# Altium PCB NUC977 DEV BOARD.PcbDoc (part 5 of 5)
Units mil, origin at the board's own origin, x right, y up, seen from the top; angles counter-clockwise.
Board outline 9012.5 x 7677.17 mil, 4 copper layers (Top, 2-GND, 3-POWER, Bottom), stack 35.4 mil thick; 487 components, 451 nets, 1969 pads, 1529 vias.
Unrouted connection lines stored in the file: 1.
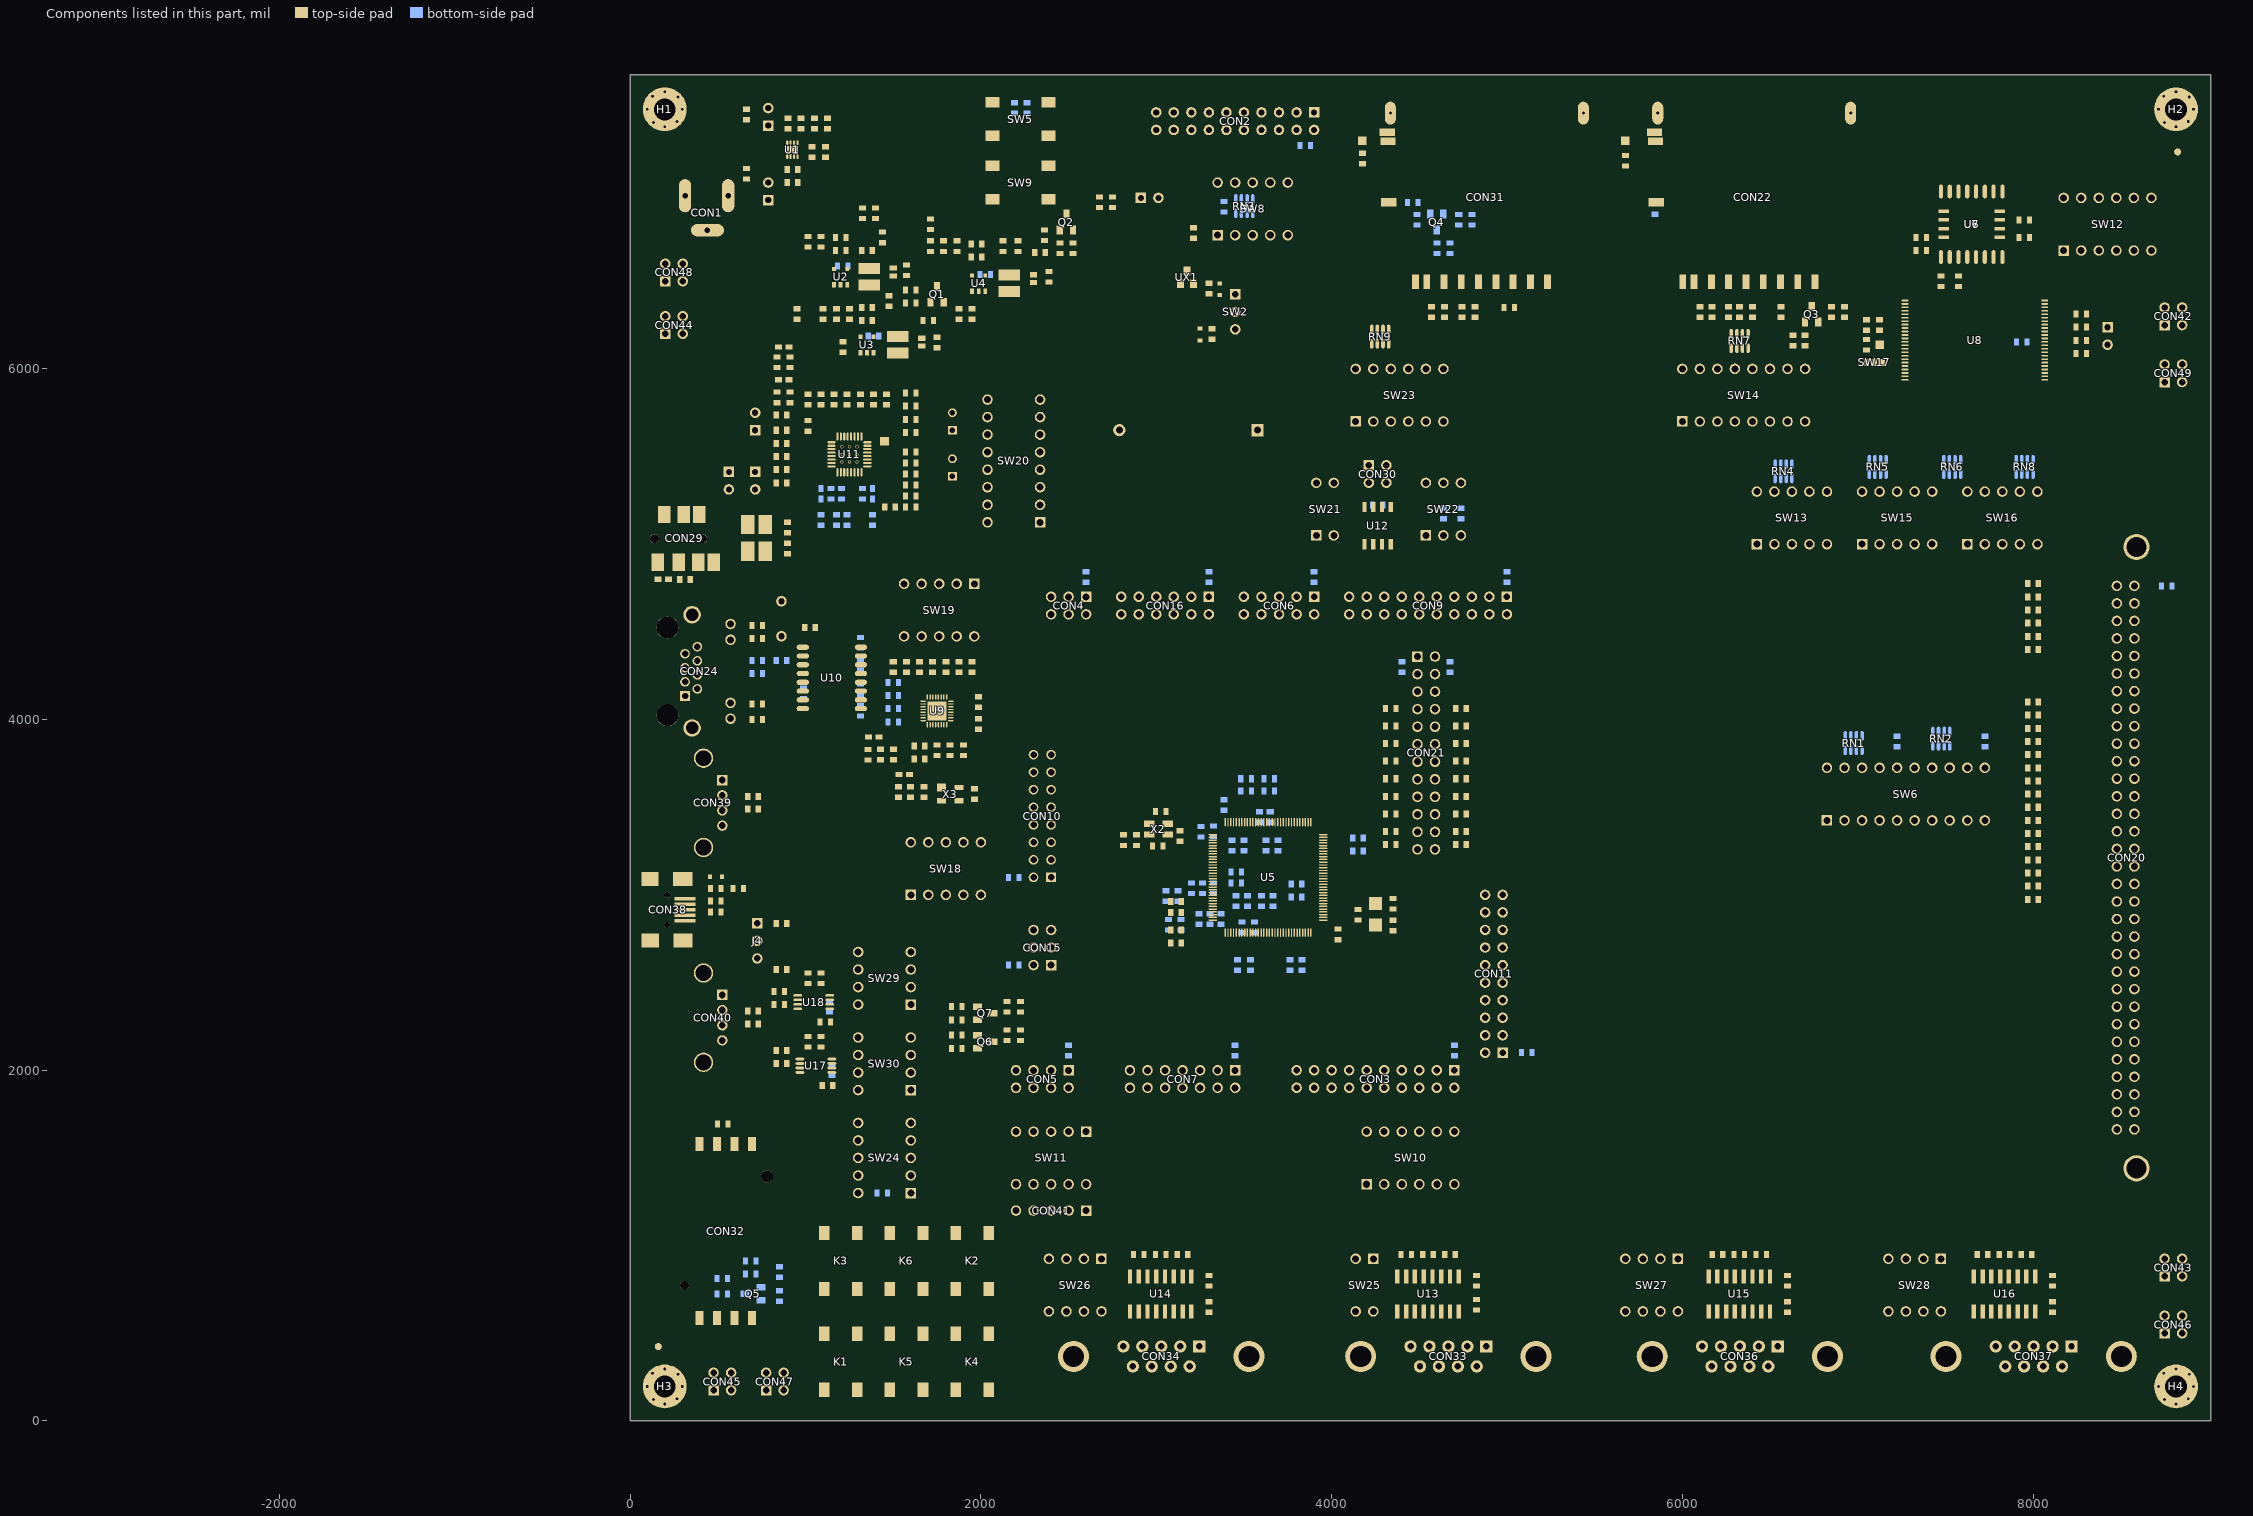
[diagram p7: the components of this part, seen from the top]

## Silkscreen, mask and mechanical layers (free items; w line width, h text height)
Silkscreen Top:
  drawing of 423 lines, arcs and shapes, not listed
  text "4 Layers PCB stack-up" at -2795.28,8208.66 h50
  text "---------------------soldermask" at -2795.28,8070.87 h50
  text "Top S---------------------1OZ(plated to 1.7mil)" at -2992.13,7972.44 h50
  text "L2 G---------------------1OZ" at -2952.76,7874.02 h50
  text "p.p.=3.5mil" at -2401.57,7814.96 h50
  text "Core=47.5mil" at -2478.11,7654.17 h50
  text "System Wake-Up" at 1936,7576 h40
  text "VIN" at 737.5,7562.5 h40
  text "L3 P---------------------1OZ" at -2933.07,7539.37 h50
  text "p.p=3.5mil" at -2362.2,7460.63 h50
  text "Bottom S---------------------1OZ(plated to 1.7mil)" at -3110.24,7381.89 h50
  text "LED1" at 1337.5,7350 h40
  text "P_FAULT" at 1518.75,7350 h40
  text "NHS-977-1-YS-1M51" at 7212.5,7275 h75
  text "---------------------soldermask" at -2775.59,7263.78 h50
  text "LED2" at 1337.5,7256.25 h40
  text "3V3" at 1587.5,7256.25 h40
  text "System Reset" at 2016,7224 h40
  text "5V DC-Plug" at 175,7212.5 h40
  text "LED3" at 1337.5,7162.5 h40
  text "1V2" at 1600,7162.5 h40
  text "ICE I/F" at 3862.5,7150 h40
  text "5VIN" at 725,7137.5 h40
  text "PCB total thickness is 1.6mm" at -2779.69,7135.07 h50
  text "2015.03.23 4L" at 7437.5,7125 h75
  text "1V8" at 1600,7068.75 h40
  text "LED4" at 1337.5,7062.5 h40
  text "PCB material:FR-4" at -2782.19,7008.07 h50
  text "ICE" at 3862.5,6875 h50
  text "ICE Reset" at 2812.5,6850 h40
  text "Differential  90ohm" at -2719.69,6833.07 h50
  text "Differential 100ohm" at -1807.18,6833.07 h50
  text "Ref." at -844.68,6758.07 h50
  text "Layer" at -3067.19,6747.57 h50
  text "Trace width" at -2769.69,6683.07 h50
  text "Spacing" at -2194.69,6683.07 h50
  text "Spacing" at -1282.18,6683.07 h50
  text "VSS" at 175,6675 h50
  text "Trace width" at -1832.19,6670.57 h50
  text "3V3" at 1437.5,6625 h40
  text "P-RTC" at 3362.5,6562.5 h40
  text "Top" at -3032.19,6533.07 h50
  text "SPI Flash" at 7700,6525 h40
  text "SPI" at 8375,6525 h50
  text "5mil" at -2582.19,6520.57 h50
  text "7mil" at -2107.19,6520.57 h50
  text "8mil" at -1207.18,6520.57 h50
  text "Layer2" at -919.68,6520.57 h50
  text "4mil" at -1657.18,6508.07 h50
  text "3V3" at 8725,6437.5 h50
  text "LDO" at 3537.5,6400 h40
  text "1V8" at 2254.31,6368.89 h40
  text "eMMC Card" at 3987.5,6362.5 h50
  text "SD Card" at 5625,6362.5 h50
  text "Bottom" at -3104.69,6360.07 h50
  text "5mil" at -2582.19,6345.57 h50
  text "7mil" at -2107.19,6345.57 h50
  text "Layer3" at -919.68,6345.57 h50
  text "CS1" at 8500,6225 h40
  text "BAT" at 3537.5,6200 h40
  text "RB1" at 8500,6125 h40
  text "3V3" at 187.5,6062.5 h50
  text "1V2" at 1612.5,6050 h40
  text "I2S" at 2150,5937.5 h50
  text "PSL" at 7062.5,5887.5 h30
  text "L-MIC" at 1725,5837.5 h40
  text "eMMC" at 3825,5837.5 h50
  text "NAND Flash" at 7487.5,5837.5 h40
  text "SD" at 5800,5825 h50
  text "VSS" at 8737.5,5787.5 h50
  text "AUXIn" at 475,5712.5 h40
  text "SPKOut" at 425,5537.5 h40
  text "CANH" at 4087.5,5487.5 h40 r270
  text "CAN Slope" at 4475,5487.5 h40
  text "CANL" at 4387.5,5475 h40 r270
  text "CAN" at 3887.5,5437.5 h50
  text "NAND" at 7150,5387.5 h40
  text "NAND" at 6575,5381.25 h40
  text "NAND" at 7768.75,5381.25 h40
  text "Earphone" at 112.5,5275 h40
  text "R-MIC" at 1712.5,5237.5 h40
  text "AUXOut" at 612.5,5200 h40
  text "LCD" at 8431.25,5112.5 h50
  text "Ethernet" at 1637.5,4875 h40
  text "PD[0:7]" at 2950,4800 h40
  text "PJ[0:4]" at 3600,4800 h40
  text "PB[0:15]" at 4400,4800 h40
  text "PE[0:1]" at 2387.5,4787.5 h40
  text "Ethernet Port" at 81.25,4668.75 h40
  text "Cfg1" at 5576.25,4543.75 h40
  text "Cfg0" at 5745,4543.75 h40
  text "Bootting from" at 5920,4543.75 h40
  text "CMOS SENSOR" at 4312.5,4462.5 h40
  text "ON" at 5607.5,4443.75 h40
  text "ON" at 5770,4443.75 h40
  text "USB." at 5920,4443.75 h40
  text "ON" at 5607.5,4350 h40
  text "OFF" at 5757.5,4350 h40
  text "eMMC Flash." at 5920,4350 h40
  text "OFF" at 5588.75,4256.25 h40
  text "ON" at 5770,4256.25 h40
  text "NAND Flash." at 5920,4256.25 h40
  text "OFF" at 5588.75,4162.5 h40
  text "OFF" at 5757.5,4162.5 h40
  text "SPI Flash." at 5920,4162.5 h40
  text "Cfg2" at 5576.25,4043.75 h40
  text "System Clock from" at 5750,4043.75 h40
  text "12MHz crystal." at 5750,3950 h40
  text "ON" at 5607.5,3943.75 h40
  text "UPLL output." at 5750,3856.25 h40
  text "OFF" at 5588.75,3850 h40
  text "Power On Setting" at 6912.5,3837.5 h50
  text "USB1 HOST" at 72,3816 h40
  text "Cfg3" at 5576.25,3731.25 h40
  text "Watch Dog Setting" at 5750,3731.25 h40
  text "OFF after power on." at 5750,3637.5 h40
  text "ON" at 5607.5,3631.25 h40
  text "PF[0:10]" at 2125,3625 h50 r270
  text "ON after power on." at 5750,3543.75 h40
  text "OFF" at 5588.75,3537.5 h40
  text "Cfg4" at 5576.25,3425 h40
  text "Setting PJ[4:0]" at 5750,3418.75 h40
  text "As GPIO pin." at 5750,3325 h40
  text "ON" at 5607.5,3318.75 h40
  text "Cfg0" at 6800,3287.5 h40 r270
  text "Cfg1" at 6900,3287.5 h40 r270
  text "Cfg2" at 7000,3287.5 h40 r270
  text "Cfg3" at 7100,3287.5 h40 r270
  text "Cfg4" at 7200,3287.5 h40 r270
  text "Cfg5" at 7300,3287.5 h40 r270
  text "Cfg6" at 7400,3287.5 h40 r270
  text "Cfg7" at 7500,3287.5 h40 r270
  text "Cfg8" at 7600,3287.5 h40 r270
  text "Cfg9" at 7700,3287.5 h40 r270
  text "As JTAG interface." at 5750,3231.25 h40
  text "OFF" at 5588.75,3225 h40
  text "USB0 Device" at 50,3150 h40
  text "Cfg5" at 5576.25,3106.25 h40
  text "UART Debug Message" at 5750,3106.25 h40
  text "Output turn ON." at 5750,3012.5 h40
  text "ON" at 5607.5,3006.25 h40
  text "Output turn OFF." at 5750,2918.75 h40
  text "OFF" at 5588.75,2912.5 h40
  text "Ethernet" at 1675,2850 h40
  text "PG[0:1]" at 2150,2850 h50 r270
  text "Cfg7" at 5576.25,2793.75 h40
  text "Cfg6" at 5745,2793.75 h40
  text "NAND Flash Page size" at 5911.5,2794 h40
  text "Device" at 825,2750 h40
  text "ON" at 5607.5,2693.75 h40
  text "ON" at 5770,2693.75 h40
  text "2KB" at 5920,2693.75 h40
  text "PI[1:15]" at 4712.5,2687.5 h50 r270
  text "HOST" at 825,2650 h40
  text "4KB" at 5920,2606.25 h40
  text "USB0 HOST" at 25,2600 h40
  text "ON" at 5607.5,2600 h40
  text "OFF" at 5757.5,2600 h40
  text "OFF" at 5588.75,2506.25 h40
  text "ON" at 5770,2506.25 h40
  text "8KB" at 5920,2506.25 h40
  text "USB" at 1700,2500 h50
  text "LED7" at 2487.5,2481.25 h40
  text "USB0 OC" at 2687.5,2481.25 h40
  text "OFF" at 5588.75,2412.5 h40
  text "OFF" at 5757.5,2412.5 h40
  text "None" at 5920,2412.5 h40
  text "LED8" at 2487.5,2387.5 h40
  text "USB1 OC" at 2693.75,2387.5 h40
  text "Cfg9" at 5576.25,2295 h40
  text "Cfg8" at 5745,2295 h40
  text "NAND Flash ECC type" at 5920,2295 h40
  text "LED9" at 2487.5,2293.75 h40
  text "USB0" at 2693.75,2293.75 h40
  text "LED10" at 2487.5,2200 h40
  text "USB1" at 2693.75,2200 h40
  text "ON" at 5607.5,2195 h40
  text "ON" at 5770,2195 h40
  text "BCH T12." at 5920,2195 h40
  text "PG[6:14]" at 3000,2100 h50
  text "PA[0:15]" at 4100,2100 h50
  text "ON" at 5607.5,2095 h40
  text "OFF" at 5757.5,2095 h40
  text "BCH T15." at 5920,2095 h40
  text "PH[0:1],PH7" at 2175,2075 h40
  text "OFF" at 5588.75,2001.25 h40
  text "ON" at 5770,2001.25 h40
  text "BCH T24." at 5920,1995 h40
  text "USB" at 1700,1975 h50
  text "OFF" at 5588.75,1907.5 h40
  text "OFF" at 5757.5,1907.5 h40
  text "None" at 5920,1907.5 h40
  text "KPI" at 2375,1725 h50
  text "CON41" at 2850,1537.5 h40
  text "SIM Card" at 1675,1500 h40
  text "SIM Card Slot" at 120,1464.5 h40 r270
  text "1" at 2800,1443.75 h40
  text "Row0" at 2956.25,1443.75 h40
  text "2" at 2800,1350 h40
  text "Row1" at 2956.25,1350 h40
  text "3" at 2800,1256.25 h40
  text "Row2" at 2956.25,1256.25 h40
  text "PWM" at 4400,1200 h40
  text "1" at 2675,1175 h40
  text "4" at 2800,1162.5 h40
  text "Col0" at 2956.25,1156.25 h40
  text "5" at 2800,1068.75 h40
  text "Col1" at 2968.75,1068.75 h40
  text "UART6" at 5700,1050 h40
  text "UART0" at 4093.75,1043.75 h40
  text "UART10" at 7237.5,1043.75 h40
  text "3V3" at 8725,1000 h50
  text "UART8" at 2462.5,987.5 h40
  text "Up" at 1550,625 h40
  text "Right" at 1900,625 h40
  text "Left" at 1150,600 h40
  text "UART6 Port" at 6637.5,518.75 h40
  text "UART8 Port" at 3325,512.5 h40
  text "UART0 Port" at 3812.5,506.25 h40
  text "UART10 Port" at 7531.25,506.25 h40
  text "VSS" at 8737.5,362.5 h50
  text "Exit" at 1150,50 h40
  text "Down" at 1525,50 h40
  text "Enter" at 1900,50 h40
  text "3V3" at 450,37.5 h50
  text "VSS" at 800,37.5 h50
Silkscreen Bottom:
  lines w4: 3418.75,2906.25 3418.75,3025 3706.25,3025 3706.25,2912.5 3862.5,2912.5 3862.5,2793.75 3675,2793.75 3675,2906.25 3418.75,2906.25
Solder Mask Top:
  region: 3443.75,3282.72 3443.75,2924.56 3825,2924.56 3825,3282.72 3443.75,3282.72
Assembly Drawing Bottom:
  lines w10: 4380.07,4359.55 4489.57,4359.55 4489.57,4457.67 ; 3407.09,3122.05 5100,3122.05 5100,4500 3407.09,4500 3407.09,3122.05
Drill Drawing:
  lines w1: 0,7677.17 0.03,7677.17 ; 9012.5,0 9012.53,0 ; 9012.5,7677.17 9012.53,7677.17 9012.5,7677.17
  lines w10: 0,7727.17 0,7805.91 ; 4269.43,7755.91 0,7755.91 ; 4743.07,7755.91 9012.5,7755.91 ; 9012.5,7727.17 9012.5,7805.91 ; 9062.5,0 9183.86,0 ; 9062.5,7677.17 9183.86,7677.17 ; 9133.86,3472.18 9133.86,0 ; 9133.86,3927.64 9133.86,7677.17 ; 0,7755.91 100,7780.91 100,7730.91 0,7755.91 ; 9012.5,7755.91 8912.5,7730.91 8912.5,7780.91 9012.5,7755.91 ; 9133.86,0 9108.86,100 9158.86,100 9133.86,0 ; 9133.86,7677.17 9158.86,7577.17 9108.86,7577.17 9133.86,7677.17
  text "228.92mm" at 4299.43,7718.41 h50
  text "195.00mm" at 9097.74,3897.64 h50 r270
Layer_19:
  lines w10: 8346.06,-12.4 8346.06,5784.65 ; 2512.5,1812.5 2512.5,4812.5 5512.5,4812.5 5512.5,1812.5 2512.5,1812.5